# Altium PCB Hardware_Tutorial.PcbDoc
Units mm, origin at the board's own origin, x right, y up, seen from the top; angles counter-clockwise.
Board outline 60 x 60 mm, 2 copper layers (Top Layer, Bottom Layer); 31 components, 41 nets, 142 pads, 42 vias.
Unrouted connection lines stored in the file: 28.
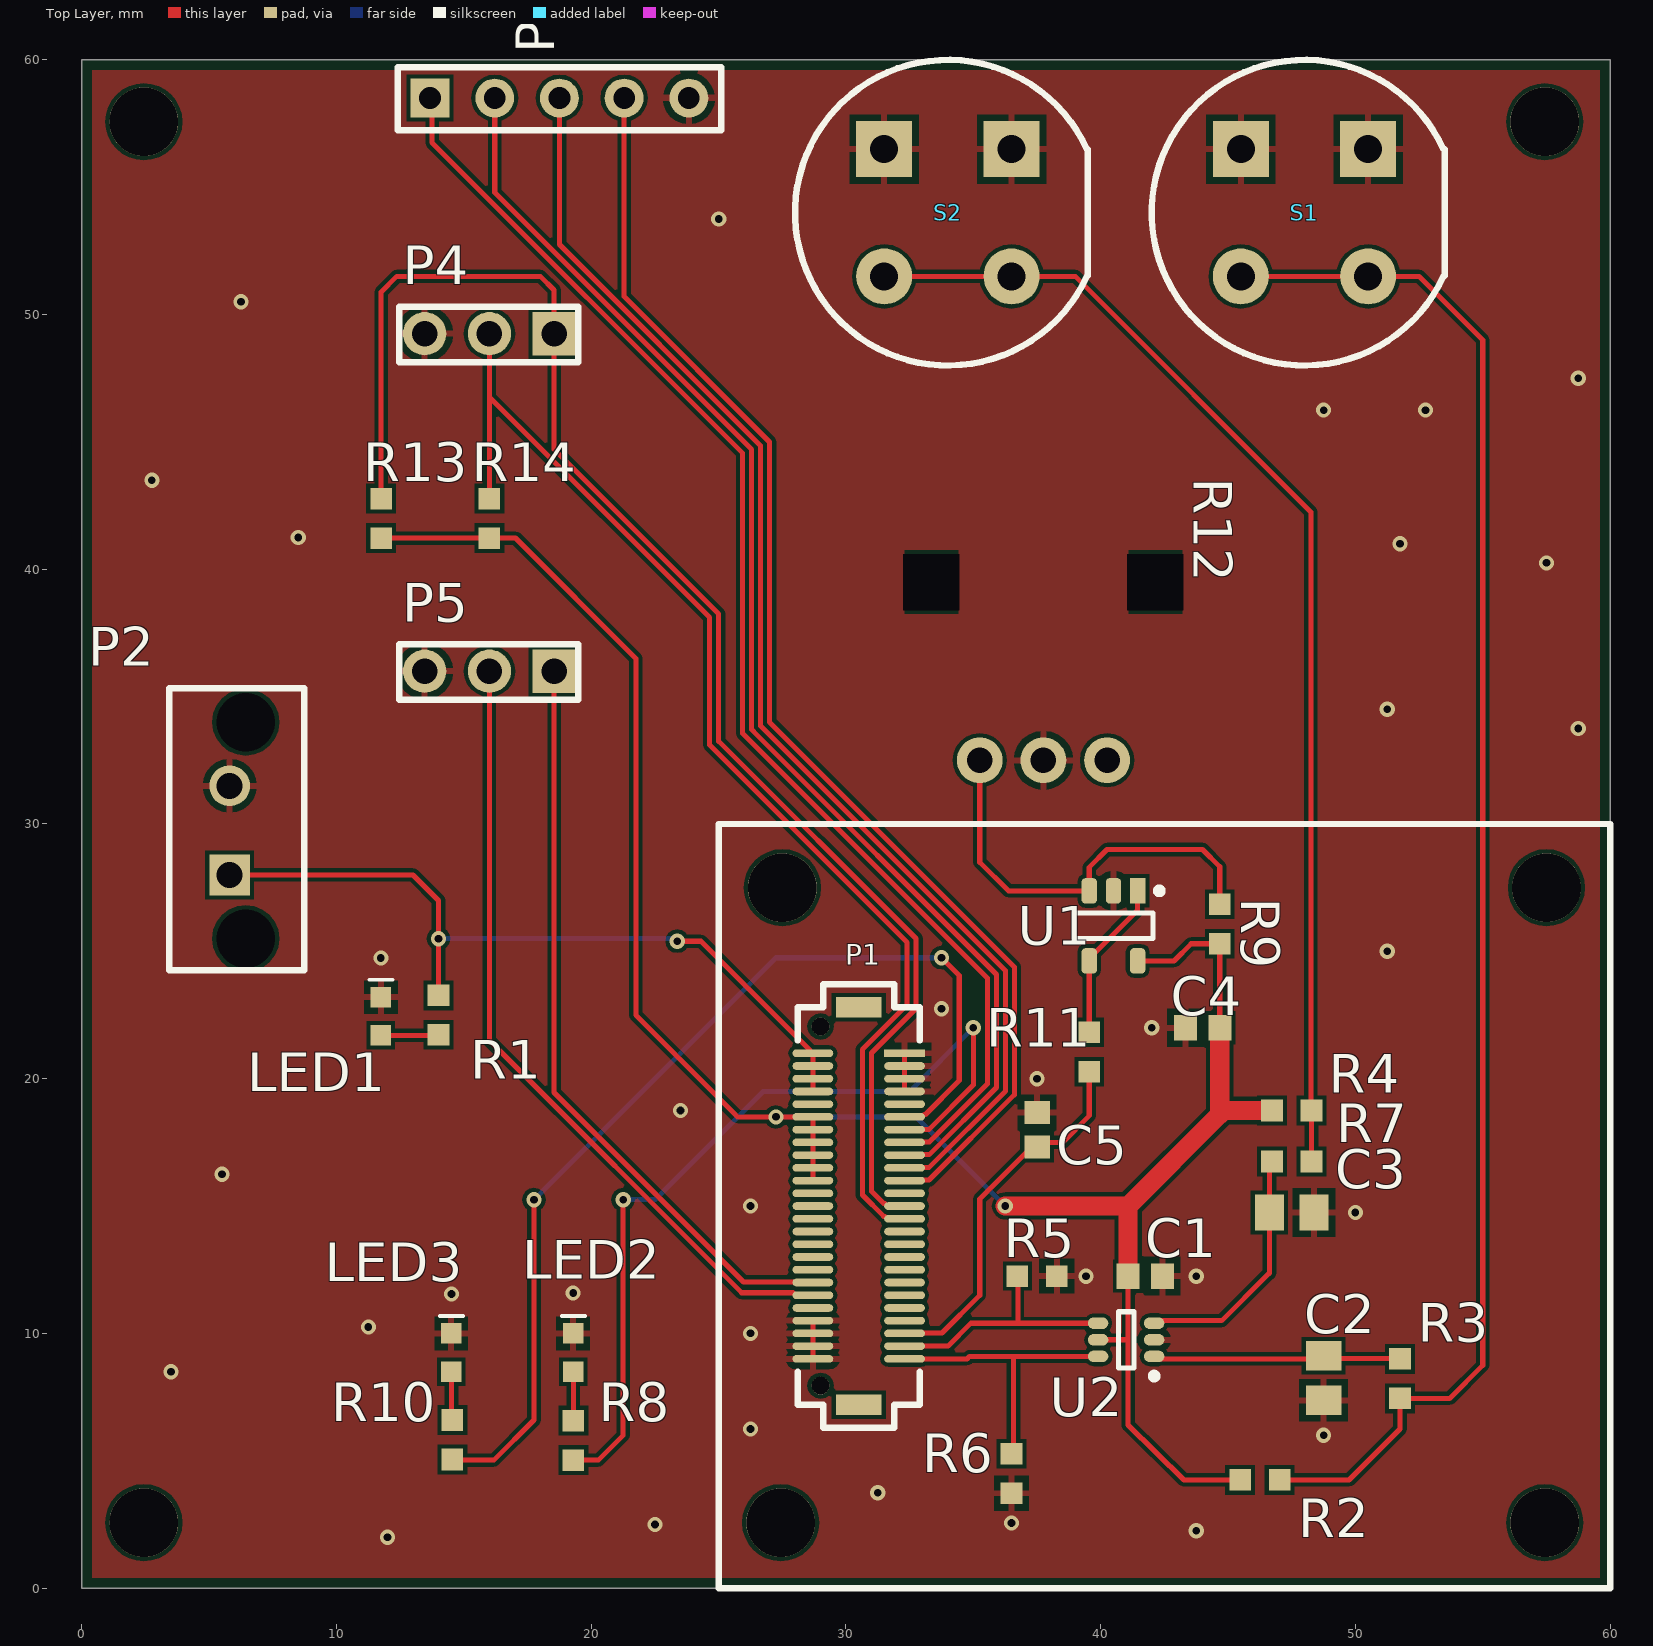
[diagram p0: Top Layer view]
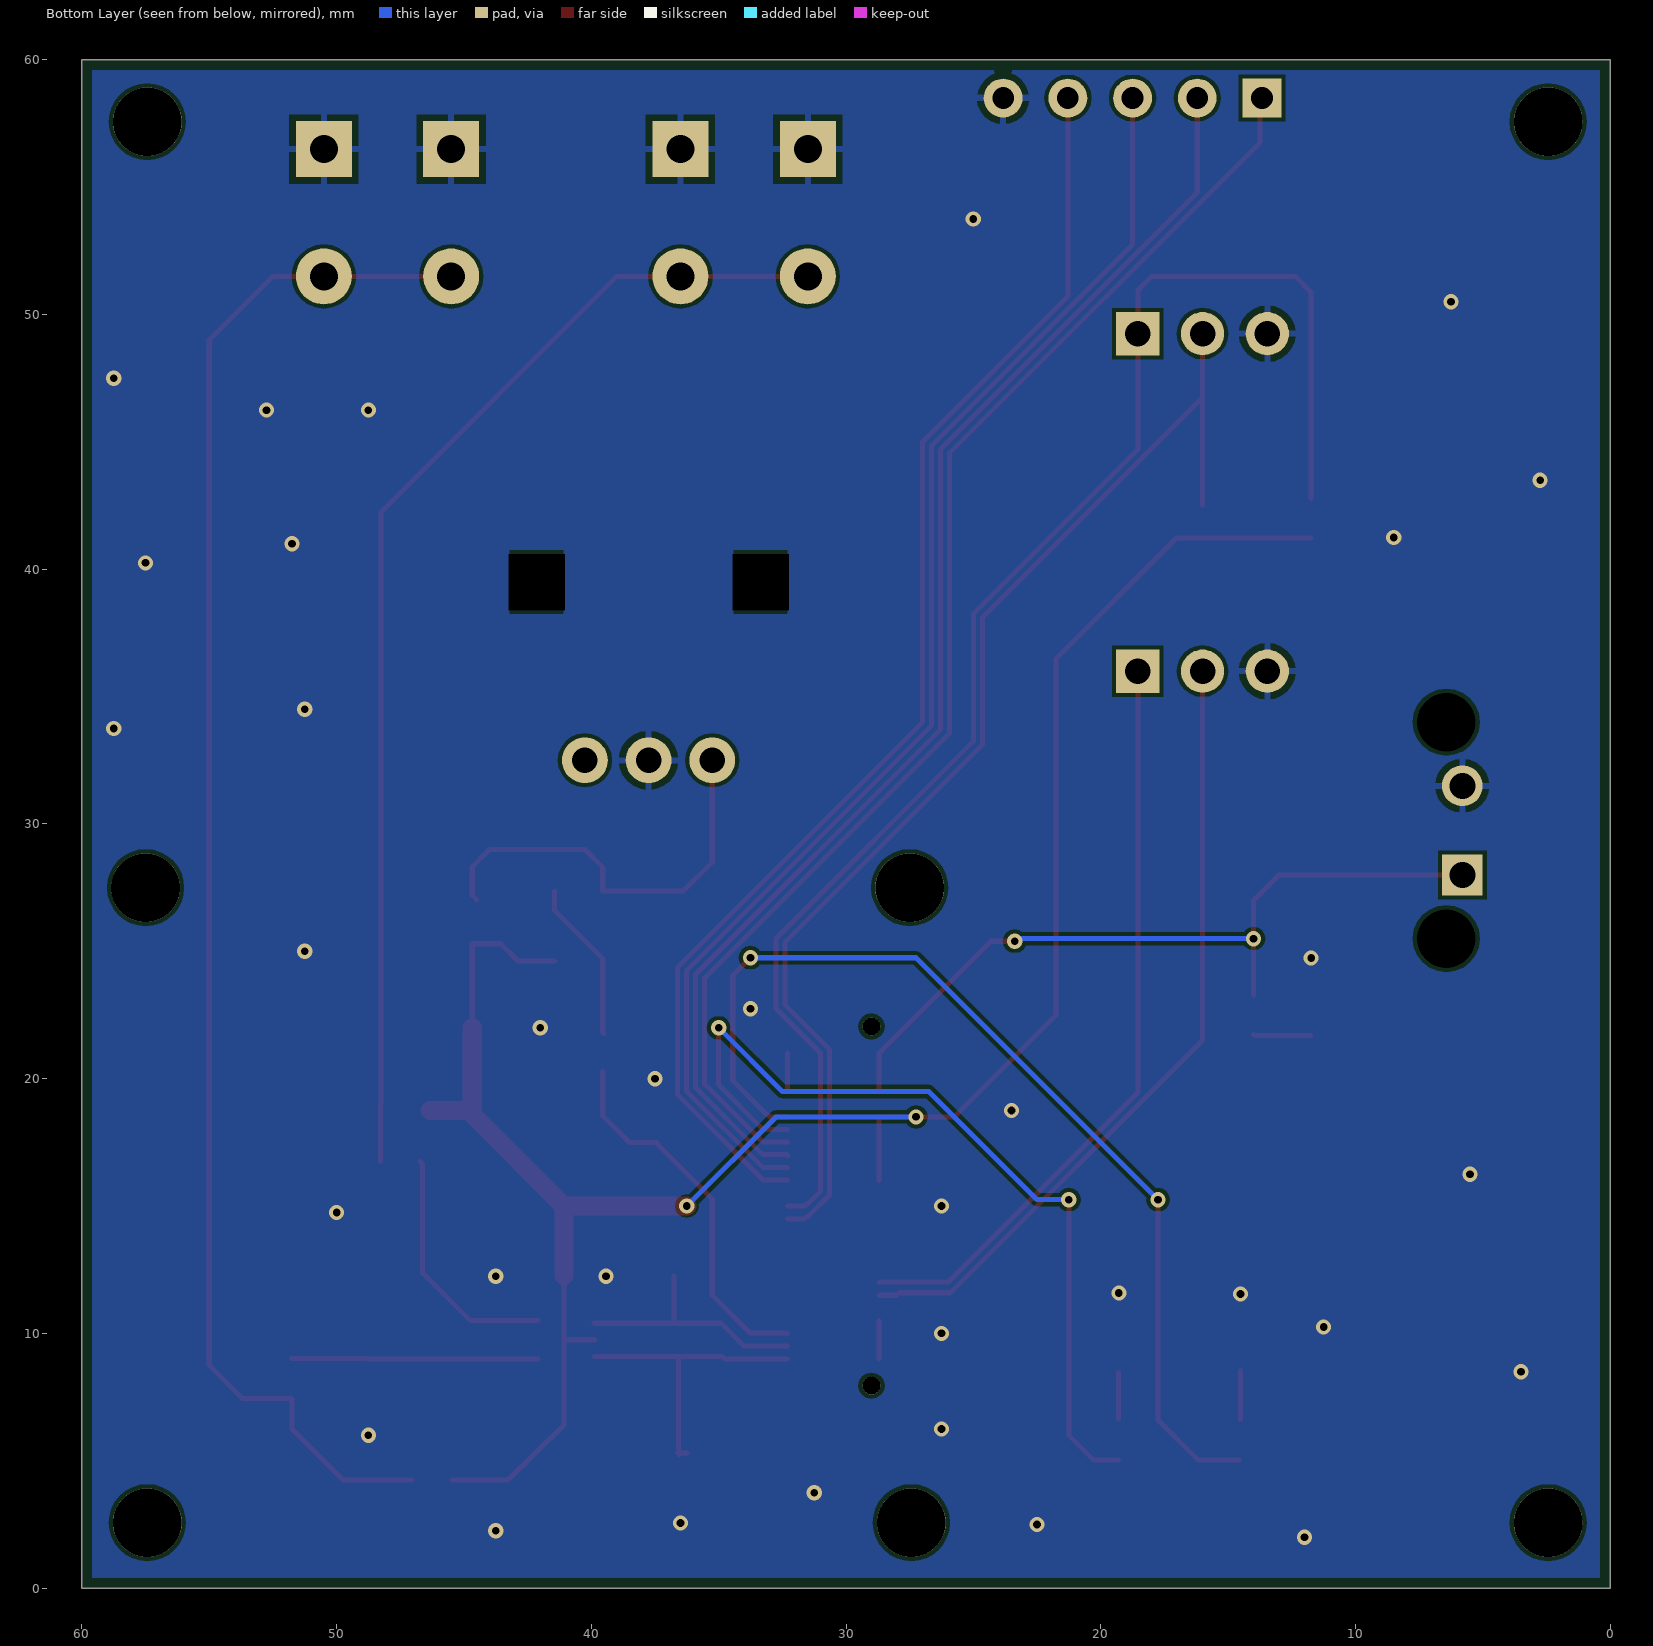
[diagram p1: Bottom Layer view, seen from below]
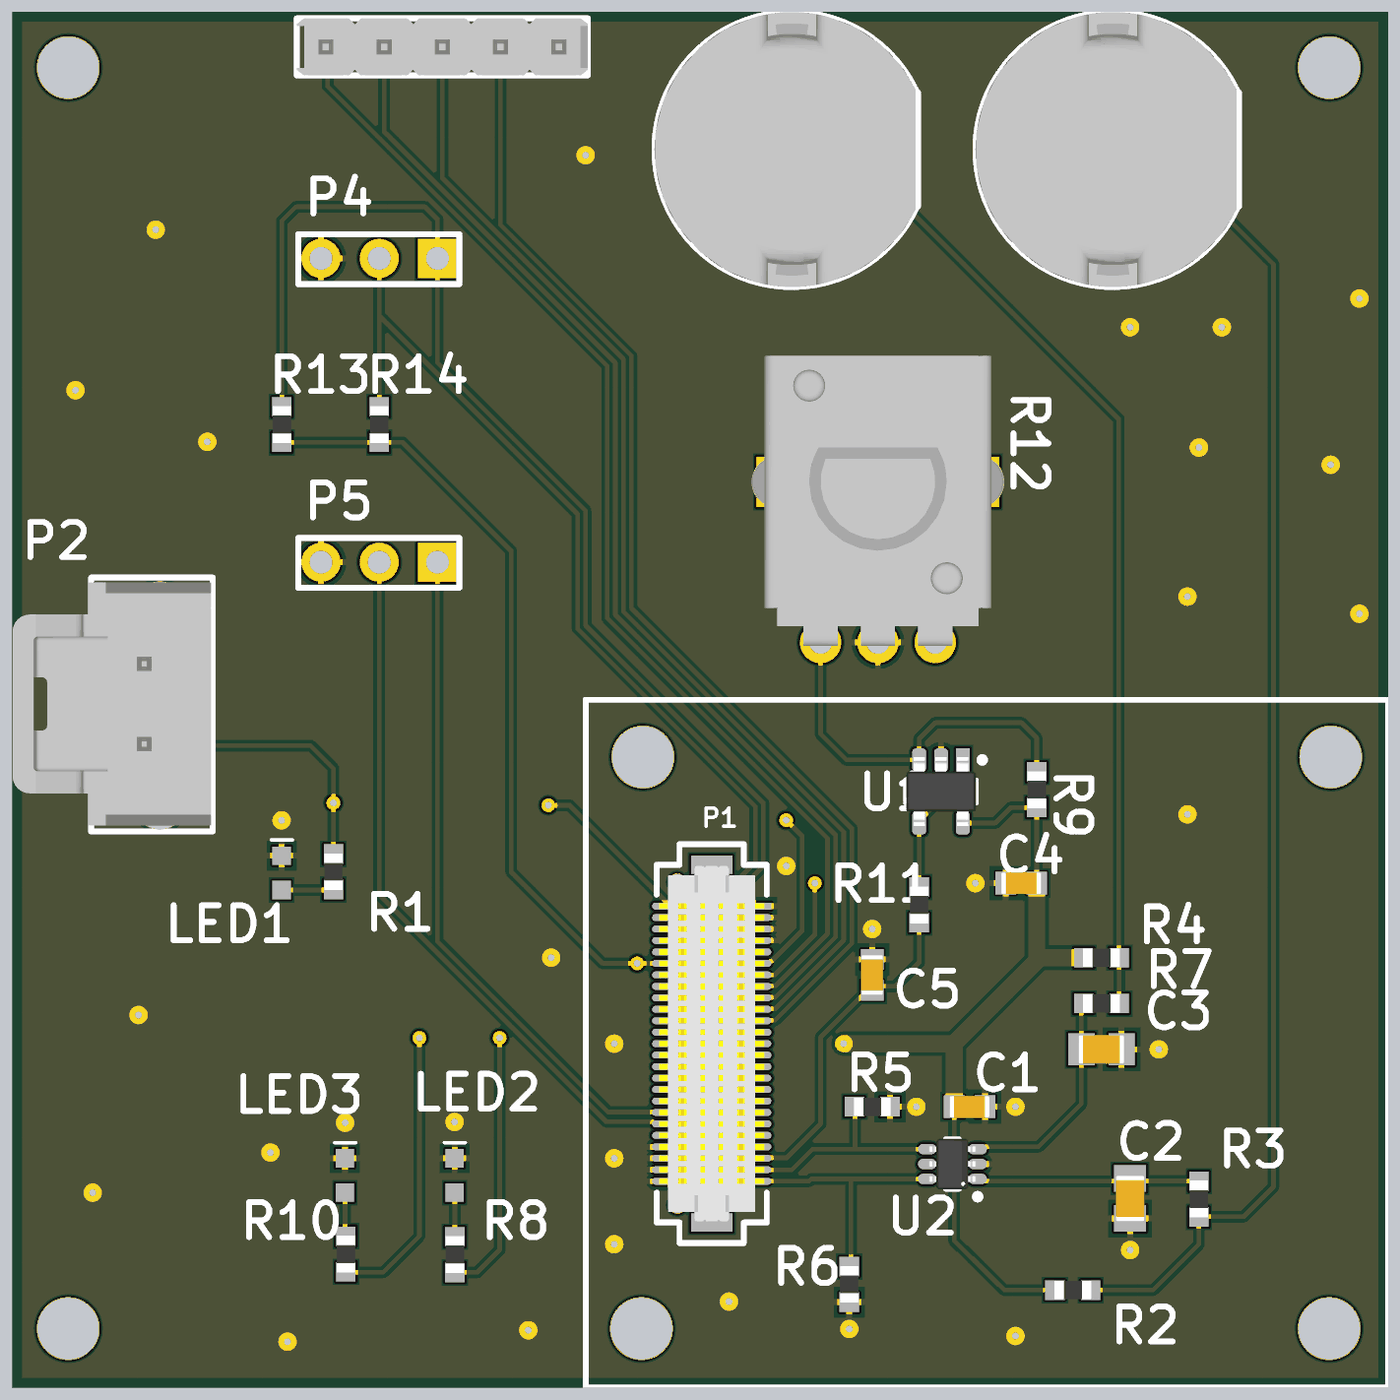
[diagram p2: 3D render of the assembled board from above, using the file's embedded part models]

## Layer stack, top to bottom
Top Solder: solder mask 0.0102, Solder Resist, Dk 3.5
Top Layer: signal copper 0.0356
Dielectric 1: dielectric 0.32, FR-4, Dk 4.8
Bottom Layer: signal copper 0.0356
Bottom Solder: solder mask 0.0102, Solder Resist, Dk 3.5

## Board outline
0,60 60,60 60,0 0,0

## Design rules (kind name [scope] priority, off if disabled: settings)
BoardOutlineClearance [All] p1: gap=0.406 ignorepadtopadclearanceinfootprint=FALSE
Clearance [All] p1: gap=0.152 ignorepadtopadclearanceinfootprint=FALSE except(0: Arc-Hole Track-Hole SMDPad-Hole THPad-Hole Via-Hole Fill-Hole Poly-Hole Region-Hole Text-Hole)
ComponentClearance ComponentClearance_ControllerBoard [InComponent('P1') vs Identifier = 'Controller_Board'] p1: gap=0 collisioncheckmode=3 verticalgap=0 showdistances=FALSE
ComponentClearance ComponentClearance_Standoffs [Identifier = 'Standoff' vs Identifier = 'Controller_Board'] p2: gap=0 collisioncheckmode=3 verticalgap=0 showdistances=FALSE
ComponentClearance [All] p3: gap=0.254 collisioncheckmode=3 verticalgap=0.254 showdistances=FALSE
HoleSize [All] p1: absolutevalues=TRUE maxlimit=6.3 minlimit=0.3 maxpercent=80.000 minpercent=20.000
MinimumAnnularRing [All] p1: minimumring=0.152
MinimumSolderMaskSliver [All] p1: minsoldermaskwidth=0.3
PolygonConnect [IsPad] p1: connectstyle=Relief reliefconductorwidth=0.254 reliefentries=4 polygonreliefangle="90 Angle" airgapwidth=0.254
PolygonConnect PolygonConnect_NoThermal [Not(IsPad)] p2: connectstyle=Direct reliefconductorwidth=0.254 reliefentries=4 polygonreliefangle="90 Angle" airgapwidth=0.254
RoutingVias [All] p1: holewidth=0.3 width=0.6 viastyle="Through Hole" minholewidth=0.3 minwidth=0.6 maxholewidth=0.711 maxwidth=1.27
SilkToSolderMaskClearance [IsPad] p1: minsilkscreentomaskgap=0.178 clearancetoexposedcopper=TRUE
SolderMaskExpansion [All] p1: expansion=0.102
Width [All] p1: maxlimit=2.54 minlimit=0.154 preferedwidth=0.2
26 further rules are at their usual default settings.

## Classes and differential pairs
component class button: * C1 C2 C3 C4 C5 LED2 LED3 R2 R3 R4 R5 R6 R7 R8 R9 R10 R11 R12 S1 S2 U1 U2
component class "Hardware Tutorial - Controller Board Interface": LED1 P1 P2 P3 P4 R1 R14

## Components (designator, comment, footprint, x,y, rotation, side; value= is the part's Value field where it differs from the comment)
C1 "CAP CER 0.1UF 50V 10% X7R 0603" "CAP, 0603" 41.75,12.25 r0 top
C2 "CAP CER 10uF 25V 10% X5R 0805" "CAP, 0805" 48.75,8.25 r270 top
C3 "CAP CER 10uF 25V 10% X5R 0805" "CAP, 0805" 47.5,14.75 r0 top
C4 "CAP CER 0.1UF 50V 10% X7R 0603" "CAP, 0603" 44,22 r180 top
C5 "CAP CER 0.1UF 50V 10% X7R 0603" "CAP, 0603" 37.5,18 r90 top
LED1 "LED GREEN CLEAR 2V 0603" LED_0603 11.75,21.75 r90 top
LED2 "LED BLUE CLEAR 2.8V 0603" LED_0603 19.295,8.55 r90 top
LED3 "LED BLUE CLEAR 2.8V 0603" LED_0603 14.51,8.55 r90 top
P1 "CONN 50POS Bergstak Plug 0.02\"" "CONN, BERGSTAK 50 POS PLUG" 30.5,15 r0 top locked
P2 "CONN 2POS ULTRA-FIT 0.138\"" "CONN, 2POS ULTRA-FIT" 5.803,28 r90 top
P3 "5POS 0.1" "CONN, 5POS HEADR 0.1\"" 13.67,58.5 r0 top
P4 "CONN 3POS HEADR MALE 0.1\"" "CONN, 3POS 0.100\" Header, 1 ROW" 18.54,49.25 r180 top
P5 "CONN 3POS HEADR MALE 0.1\"" "CONN, 3POS 0.100\" Header, 1 ROW" 18.54,36 r180 top
R1 "RES 4.7K OHM 1% 1/10W 0603" "RES, 0603" 14,22.5 r270 top
R2 "RES 10K OHM 1% 1/10W 0603" "RES, 0603" 46.25,4.25 r0 top
R3 "RES 1.6K OHM 1% 1/10W 0603" "RES, 0603" 51.75,8.225 r90 top
R4 "RES 10K OHM 1% 1/10W 0603" "RES, 0603" 47.5,18.75 r0 top
R5 "RES 10K OHM 1% 1/10W 0603" "RES, 0603" 37.5,12.25 r0 top
R6 "RES 10K OHM 1% 1/10W 0603" "RES, 0603" 36.5,4.5 r270 top
R7 "RES 1.6K OHM 1% 1/10W 0603" "RES, 0603" 47.5,16.75 r180 top
R8 "RES 510 OHM 5% 1/10W 0603" "RES, 0603" 19.295,5.8 r90 top
R9 "RES 10K OHM 1% 1/10W 0603" "RES, 0603" 44.675,26.075 r90 top
R10 "RES 510 OHM 5% 1/10W 0603" "RES, 0603" 14.545,5.825 r90 top
R11 "RES 100 OHM 1% 1/10W 0603" "RES, 0603" 39.55,21.05 r270 top
R12 "POT 10K OHM LINEAR THROUGH HOLE" "POT 10K OHM LINEAR THROUGH HOLE" 37.75,32.5 r0 top
R13 "RES 4.7K OHM 1% 1/10W 0603" "RES, 0603" 11.75,42 r90 top
R14 "RES 4.7K OHM 1% 1/10W 0603" "RES, 0603" 16,42 r90 top
S1 "SPST" "SW SPST D6 SERIES BLUE" 50.5,56.5 r180 top
S2 "SPST" "SW SPST D6 SERIES BLUE" 36.5,56.5 r180 top
U1 "IC OP AMP GEN PURPOSE RR 10MHZ SOT-23-5" "IC OP AMP GP RR 10MHZ SOT-23-5" 40.5,26 r270 top
U2 "IC INVERTER SCHMITT 2CH 6-TSSOP" SOT363 41,9.75 r180 top

## Footprints (in the part's own frame and the unit in brackets; to place one, negate y for a bottom-side part, rotate by r counter-clockwise, add the part's x,y. Pads: shape width x height; smd on the part's side, far side on the other; paste and mask are expansions set on the pad)
"CAP, 0603" [mm] "Chip Capacitor, 2-Leads, Body 1.60x0.81mm, IPC Medium Density"
  rect 0.9x1 smd mask+0.076: 1(-0.675,0) 2(0.675,0)
  body extent -0.87,-0.48 0.87,0.48, height 0.9
"CAP, 0805" [mm] "Chip Capacitor, 2-Leads, Body 2.00x1.25mm, IPC Medium Density"
  rect 1.15x1.4 smd: 1(-0.875,0) 2(0.875,0)
  body extent -1,-0.63 1,0.63, height 1.25
"CONN, 2POS ULTRA-FIT" [mm] "2 Positions Header, Shrouded Connector 0.138\" (3.50mm) Through Hole Gold"
  rect 1.6x1.6 hole 1.02: 1(0,0)
  round 1.6 hole 1.02: 2(3.5,0)
  round 1.6 hole 2.3: ""(-2.5,-0.63) ""(6,-0.63)
  silkscreen extent -3.74,-2.93 7.33,2.37, body extent -3.48,-2.87 7.12,5.79, height 13.85
"CONN, 3POS 0.100\" Header, 1 ROW" [mm] "Connector, 3 position 0.1\" (2.54mm) Through Hole Generic Header"
  rect 1.7x1.7 hole 1: 1(0,0)
  round 1.7 hole 1: 2(2.54,0) 3(5.08,0)
  silkscreen extent -0.95,-1.06 6.08,1.12
"CONN, 5POS HEADR 0.1\"" [mil]
  rect 60x60 hole 33.46: 1(0,0)
  round 60 hole 33.46: 2(100,0) 3(200,0) 4(300,0) 5(400,0)
  silkscreen extent -50,-50 450,48, body extent -50,-50 450,48, height 335
"CONN, BERGSTAK 50 POS PLUG" [mm] "Bergstak 50 Position Plug"
  rect 1.6x0.3 smd: 1(1.8,6)
  oval 1.6x0.3 smd: 2(1.8,5.5) 3(1.8,5) 4(1.8,4.5) 5(1.8,4) 6(1.8,3.5) 7(1.8,3) 8(1.8,2.5) 9(1.8,2) 10(1.8,1.5) 11(1.8,1) 12(1.8,0.5) 13(1.8,0) 14(1.8,-0.5) 15(1.8,-1) 16(1.8,-1.5) 17(1.8,-2) 18(1.8,-2.5) 19(1.8,-3) 20(1.8,-3.5) 21(1.8,-4) 22(1.8,-4.5) 23(1.8,-5) 24(1.8,-5.5) 25(1.8,-6) 26(-1.8,-6) 27(-1.8,-5.5) 28(-1.8,-5) 29(-1.8,-4.5) 30(-1.8,-4) 31(-1.8,-3.5) 32(-1.8,-3) 33(-1.8,-2.5) 34(-1.8,-2) 35(-1.8,-1.5) 36(-1.8,-1) 37(-1.8,-0.5) 38(-1.8,0) 39(-1.8,0.5) 40(-1.8,1) 41(-1.8,1.5) 42(-1.8,2) 43(-1.8,2.5) 44(-1.8,3) 45(-1.8,3.5) 46(-1.8,4) 47(-1.8,4.5) 48(-1.8,5) 49(-1.8,5.5) 50(-1.8,6)
  round 0.7 hole 0.7: ""(-1.5,-7.05) ""(-1.5,7.05)
  rect 1.8x0.8 smd: ""(0,-7.8) ""(0,7.8)
  silkscreen extent -2.4,-8.7 2.4,8.7, body extent -2.3,-7.75 2.3,7.75, height 4.2
"IC OP AMP GP RR 10MHZ SOT-23-5" [mm] "SOT23, 5-Leads, Body 2.90x2.80mm, Pitch 0.95mm, IPC Medium Density"
  rect 1x0.6 smd: 1(-1.375,0.95)
  rrect50% 1x0.6 smd: 2(-1.375,0) 3(-1.375,-0.95) 4(1.375,-0.95) 5(1.375,0.95)
  silkscreen extent -1.5,-1.55 0.5,1.93, body extent -1.5,-1.53 1.5,1.53, height 1.45
LED_0603 [mm]
  rect 0.8x0.8 smd: 1(-0.05,0.01) 2(1.45,0.01)
  silkscreen extent 2.13,-0.46 2.13,0.45, body extent -0.09,-0.39 1.51,0.41, height 0.8
"POT 10K OHM LINEAR THROUGH HOLE" [mm]
  round 1.8 hole 1: 1(-2.5,0) 2(0,0) 3(2.5,0)
  rect 1.8x2.2 hole 2.2 square: 4(-4.4,7) 4(4.4,7)
  body extent -5.7,-0.15 5.7,12.5, height 14.5
"RES, 0603" [mm] "Chip Resistor, 2-Leads, Body 1.60x0.80mm, IPC Medium Density"
  rect 0.85x0.85 smd: 1(-0.775,0) 2(0.775,0)
  body extent -0.8,-0.4 0.8,0.4, height 0.55
SOT363 [mm] "TSOP, 6-Leads, Body 2.00x1.25mm, Pitch 0.65mm, IPC Medium Density"
  oval 0.8x0.45 smd: 1(-1.1,0.65) 2(-1.1,0) 3(-1.1,-0.65) 4(1.1,-0.65) 5(1.1,0) 6(1.1,0.65)
  silkscreen extent -1.23,-1.1 0.3,1.55, body extent -1.04,-1.1 1.04,1.1, height 1.1
"SW SPST D6 SERIES BLUE" [mm]
  rect 2.2x2.2 hole 1.1: 1(0,0) 1(5,0)
  round 2.2 hole 1.1: 2(0,5) 2(5,5)
  silkscreen extent -3,-3.5 8.5,8.5, body extent -2.9,-3.5 8.5,8.5, height 6.17

## Part data
C1 C4 C5: "0.10μF ±10% 50V Ceramic Capacitor X7R 0603 (1608 Metric)", Capacitance=0.1μF, Manufacturer 1="AVX Corporation", Manufacturer Part Number 1=06035C104KAT2A, Operating Temperature="-55°C ~ 125°C", Package / Case="0603 (1608 Metric)", Ratings=-, Supplier Part Number 1=478-5052-1-ND, Temperature Coefficient=X7R, Tolerance=±10%, Voltage=50V, ComponentLink1Description=http://datasheets.avx.com/X7RDielectric.pdf, ComponentLink1URL=http://datasheets.avx.com/X7RDielectric.pdf, Height - Seated (Max)=-, Lead Spacing=-, Lead Style=-, Mounting Type="Surface Mount, MLCC", Packaging="Cut Tape (CT)", Part Status=Active, Size / Dimension="0.063\" L x 0.032\" W (1.60mm x 0.81mm)", Supplier 1=Digi-Key, Thickness (Max)="0.035\" (0.90mm)"
C2 C3: "10μF ±10% 25V Ceramic Capacitor X5R 0805 (2012 Metric)", Capacitance=10μF, Manufacturer="Murata Electronics North America", Manufacturer Part Number=GRM21BR61E106KA73L, Operating Temperature="-55°C ~ 85°C", Package / Case="0805 (2012 Metric)", Ratings=-, Supplier Part Number 1=490-5523-1-ND, Temperature Coefficient=X5R, Tolerance=±10%, Voltage - Rated=25V, Applications="General Purpose", Category=Capacitors, ComponentLink1Description=http://search.murata.co.jp/Ceramy/image/img/A01X/G101/ENG/GRM21BR61E106KA73-01.pdf, ComponentLink1URL=http://search.murata.co.jp/Ceramy/image/img/A01X/G101/ENG/GRM21BR61E106KA73-01.pdf, Features=-, Height - Seated (Max)=-, Lead Spacing=-, Lead Style=-, Mounting Type="Surface Mount, MLCC", Packaging="Cut Tape (CT)", Part Status=Active, Pricing 1="1=0.3, 10=0.214, 100=0.1008, 500=0.07068, 1000=0.05851 (CAD)", RoHS="RoHS Compliant", Size / Dimension="0.079\" L x 0.049\" W (2.00mm x 1.25mm)", Stock 1=1695157, Supplier 1=Digi-Key, Thickness (Max)="0.053\" (1.35mm)"
LED1: "Green 572nm LED Indication - Discrete 2V 0603 (1608 Metric)", Color=Green, Current - Test=20mA, Lens Color=Colorless, Manufacturer="Wurth Electronics Inc.", Manufacturer Part Number=150060VS75000, Millicandela Rating=40mcd, Package / Case="0603 (1608 Metric)", Supplier Device Package=0603, Supplier Part Number 1=732-4980-1-ND, Voltage - Forward (Vf) (Typ)=2V, Category=Optoelectronics, ComponentLink1Description=http://katalog.we-online.de/led/datasheet/150060VS75000.pdf, ComponentLink1URL=http://katalog.we-online.de/led/datasheet/150060VS75000.pdf, Features=-, Height (Max)=0.80mm, Lens Style/Size="Rectangle with Flat Top, 1.10mm x 0.70mm", Lens Transparency=Clear, Mounting Type="Surface Mount", Packaging="Cut Tape (CT)", Part Status=Active, Pricing 1="1=0.21, 100=0.1617, 500=0.13964 (CAD)", RoHS="RoHS Compliant", Size / Dimension="1.60mm L x 0.80mm W", Stock 1=9408, Supplier 1=Digi-Key, Viewing Angle=140°, Wavelength - Dominant=570nm, Wavelength - Peak=572nm
LED2 LED3: "Blue 470nm LED Indication - Discrete 2.8V 0603 (1608 Metric)", Color=Blue, Current - Test=5mA, Lens Color=Colorless, Manufacturer 1="Lite-On Inc.", Manufacturer Part Number 1=LTST-C193TBKT-5A, Millicandela Rating=15mcd, Package / Case="0603 (1608 Metric)", Supplier Device Package="Chip LED", Supplier Part Number 1=160-1827-1-ND, Voltage - Forward (Vf) (Typ)=2.8V, ComponentLink1Description=http://optoelectronics.liteon.com/upload/download/DS22-2004-060/P_100_LTST-C193TBKT-5A.pdf, ComponentLink1URL=http://optoelectronics.liteon.com/upload/download/DS22-2004-060/P_100_LTST-C193TBKT-5A.pdf, Height (Max)=0.45mm, Lens Style/Size="Rectangle with Flat Top, 1.15mm x 0.80mm", Lens Transparency=Clear, Mounting Type="Surface Mount", Packaging="Cut Tape (CT)", Part Status=Active, Size / Dimension="1.60mm L x 0.80mm W", Supplier 1=Digi-Key, Viewing Angle=130°, Wavelength - Dominant=470nm, Wavelength - Peak=468nm
P1: "50 Position Connector Plug, Outer Shroud Contacts Surface Mount Gold", Manufacturer 1="Amphenol FCI", Manufacturer Part Number 1=10132797-055100LF, Supplier Part Number 1=609-5226-1-ND, ComponentLink1Description=http://portal.fciconnect.com/Comergent//fci/drawing/10132797.pdf, ComponentLink1URL=http://portal.fciconnect.com/Comergent//fci/drawing/10132797.pdf, Connector Type="Plug, Outer Shroud Contacts", Contact Finish=Gold, Contact Finish Thickness="1μin (0.025μm)", Height Above Board="0.169\" (4.30mm)", Mated Stacking Heights=5mm, Mounting Type="Surface Mount", Number of Positions=50, Number of Rows=2, Packaging="Cut Tape (CT)", Part Status=Active, Pitch="0.020\" (0.50mm)", Series="BergStak Plug", Supplier 1=Digi-Key
P2: "Connector Header Through Hole 2 position 0.138\" (3.50mm)", Color=Black, Manufacturer=Molex, Manufacturer Part Number=1722871102, Supplier Part Number 1=WM11701-ND, ComponentLink1Description=http://www.molex.com/pdm_docs/sd/1722861302_sd.pdf, ComponentLink1URL=http://www.molex.com/pdm_docs/sd/1722861302_sd.pdf, Connector Type="Male Pin", Contact Plating=Tin, Fastening Type=Latch, Mount="Through Hole", Number of Positions=2, Number of Rows=1, Packaging=Tray, Pitch=0.138inch, Pricing 1="1 = 0.78000, 10 = 0.68800, 100 = 0.59380, 500 = 0.48582, 1000 = 0.43184, 5000 = 0.37786, 10000 = 0.35897 (USD)", RoHS=Yes, Series=UltraFit, Stock 1=2743, Supplier 1=Digi-Key, Termination=Solder
P3: library part "CONN 5POS HEADR MALE 0.1in", "5 Positions Header, Breakaway Connector 0.100\" (2.54mm) Through Hole Tin", Colour=Black, Contact Resistance=20mR, Manufacturer 1=Molex, Manufacturer Part Number 1=0022284050, Max Operating Temperature=75°C, Max Voltage Rating (AC)=250V, Min Operating Temperature=0°C, Supplier Part Number 1=WM50014-05-ND, ComponentLink1Description=https://datasheet.ciiva.com/6814/022284363-sd-6814049.pdf, ComponentLink1URL=https://datasheet.ciiva.com/6814/022284363-sd-6814049.pdf, ComponentLink2Description=https://datasheet.ciiva.com/14804/179390022284050-pcb-headers-14804361.pdf, ComponentLink2URL=https://datasheet.ciiva.com/14804/179390022284050-pcb-headers-14804361.pdf, ComponentLink3Description=https://datasheet.ciiva.com/15217/getdatasheetpartid-256138-15217709.pdf, ComponentLink3URL=https://datasheet.ciiva.com/15217/getdatasheetpartid-256138-15217709.pdf, Connector Type="Male Pin", Contact Material=Bronze,Brass, Contact Mating Length=0.24inch, Contact Plating=Nickel,Tin, Depth=2.49mm, Description 1="Conn Unshrouded Header HDR 5 POS 2.54mm Solder ST Thru-Hole KK? Bag", Gender=Male, Housing Colour=Black, Housing Material=Nylon, Length=12.7mm, Max Voltage Rating (DC)=250V, Mount="Through Hole", Number of Contacts=5, Number of Positions=5, Number of Rows=1, Orientation=Straight, Packaging=Bulk, Pitch=2.54mm, Pricing 1="1=0.22, 10=0.21, 25=0.1796, 50=0.157, 100=0.1459, 250=0.129, 500=0.1234 (USD)", Stock 1=3161, Supplier 1=Digi-Key, Termination=Solder
P4 P5: "3 Positions Header Connector 0.100\" (2.54mm) Through Hole Gold", Current Rating=3A, Insulation Color=Black, Manufacturer 1="Wurth Electronics Inc.", Manufacturer Part Number 1=61300311121, Material Flammability Rating="UL94 V-0", Operating Temperature="-40°C ~ 125°", Supplier Part Number 1=732-5316-ND, Voltage=250V, ComponentLink1Description=http://katalog.we-online.de/em/datasheet/6130xx11121.pdf, ComponentLink1URL=http://katalog.we-online.de/em/datasheet/6130xx11121.pdf, Connector Type=Header, Contact Finish - Mating=Gold, Contact Finish - Post=-, Contact Finish Thickness - Mating=-, Contact Finish Thickness - Post=-, Contact Length - Mating="0.236\" (6.00mm)", Contact Length - Post="0.118\" (3.00mm)", Contact Material="Copper Alloy", Contact Shape=Square, Contact Type="Male Pin", Fastening Type=-, Ingress Protection=-, Insulation Height="0.100\" (2.54mm)", Insulation Material="Polybutylene Terephthalate (PBT)", Mated Stacking Heights=-, Mounting Type="Through Hole", Number of Positions=3, Number of Positions Loaded=All, Number of Rows=1, Overall Contact Length="0.454\" (11.54mm)", Packaging=Bulk, Part Status=Active, Pitch - Mating="0.100\" (2.54mm)", Row Spacing - Mating=-, Shrouding=Unshrouded, Style="Board to Board or Cable", Supplier 1=Digi-Key, Termination=Solder
R1 R13 R14: "4.7k Ohm ±1% 0.1W, 1/10W Chip Resistor 0603 (1608 Metric) Moisture Resistant Thick Film", Manufacturer 1=Yageo, Manufacturer Part Number 1=RC0603FR-074K7L, Operating Temperature="-55°C ~ 155°", Package / Case="0603 (1608 Metric)", Power (Watts)=1/10W, Resistance (Ohms)=4.7k, Supplier Device Package=0603, Supplier Part Number 1=311-4.70KHRCT-ND, Temperature Coefficient=±100ppm/°, Tolerance=±1%, Category=Resistors, ComponentLink1Description=http://www.yageo.com/documents/recent/PYu-RC_Group_51_RoHS_L_7.pdf, ComponentLink1URL=http://www.yageo.com/documents/recent/PYu-RC_Group_51_RoHS_L_7.pdf, Composition="Thick Film", Description 1="RES SMD 4.7K OHM 1% 1/10W 0603", Failure Rate=-, Features="Moisture Resistant", Height - Seated (Max)="0.022\" (0.55mm)", Packaging="Cut Tape (CT)", Part Status=Active, Pricing 1="1=0.16, 10=0.022, 100=0.0089, 1000=0.00402, 2500=0.00349 (CAD)", RoHS="RoHS Compliant", Size / Dimension="0.063\" L x 0.031\" W (1.60mm x 0.80mm)", Stock 1=3487566, Supplier 1=Digi-Key
R2 R4 R5 R6 R9: "RES SMD 10K OHM 1% 1/10W 0603", Manufacturer 1=Yageo, Manufacturer Part Number 1=RC0603FR-0710KL, Operating Temperature="-55°C ~ 155°", Package / Case="0603 (1608 Metric)", Power=1/10W, Resistance=10k, Supplier Device Package=0603, Supplier Part Number 1=311-10.0KHRCT-ND, Temperature Coefficient=±100ppm/°, Tolerance=±1%, ComponentLink1Description=http://www.yageo.com/documents/recent/PYu-RC_Group_51_RoHS_L_7.pdf, ComponentLink1URL=http://www.yageo.com/documents/recent/PYu-RC_Group_51_RoHS_L_7.pdf, Composition="Thick Film", Failure Rate=-, Height - Seated (Max)="0.022\" (0.55mm)", Packaging="Cut Tape (CT)", Part Status=Active, Size / Dimension="0.063\" L x 0.031\" W (1.60mm x 0.80mm)", Supplier 1=Digi-Key
R3 R7: "1.6 kOhms ±1% 0.1W, 1/10W Chip Resistor 0603 (1608 Metric) Moisture Resistant Thick Film", Case/Package=0603, Case Code (Metric)=1608, Manufacturer=Yageo, Manufacturer Part Number=RC0603FR-071K6L, Max Operating Temperature=155°C, Min Operating Temperature=-55°C, Power Rating=1/10W, Resistance=1.6k, Supplier Part Number 1=311-1.60KHRCT-ND, Temperature Coefficient=100ppm/°C, Tolerance=1%, Voltage Rating=50V, Working Voltage=75V, Case Code (Imperial)=0603, ComponentLink1Description=http://components.arrow.com/part/dataview/0323_00200779, ComponentLink1URL=http://components.arrow.com/part/dataview/0323_00200779, ComponentLink2Description=http://www.yageo.com.tw/exep/pages/download/literatures/PYu-R_INT-thick_7.pdf, ComponentLink2URL=http://www.yageo.com.tw/exep/pages/download/literatures/PYu-R_INT-thick_7.pdf, ComponentLink3Description=http://www.mouser.com/ds/2/447/RC0603-272842.pdf, ComponentLink3URL=http://www.mouser.com/ds/2/447/RC0603-272842.pdf, ComponentLink4Description=http://www.yageo.com/documents/recent/PYu-RC0603_51_RoHS_L_v5.pdf, ComponentLink4URL=http://www.yageo.com/documents/recent/PYu-RC0603_51_RoHS_L_v5.pdf, Composition="Thick Film", Depth=0.8mm, Lead Free="Lead Free", Length=1.6mm, Military Standard=Not, Number of Terminations=2, Packaging="Tape and Reel", Pricing 1="1=0.1, 10=0.015, 100=0.006, 1000=0.0027, 2500=0.0023 (USD)", Stock 1=189550, Supplier 1=Digi-Key, Termination=SMD/SMT, Voltage Rating (DC)=50V
R8 R10: "RES SMD 510 OHM 5% 1/10W 0603", Manufacturer 1=Yageo, Manufacturer Part Number 1=RC0603JR-07510RL, Operating Temperature="-55°C ~ 155°", Package / Case="0603 (1608 Metric)", Power=1/10W, Resistance=510, Supplier Device Package=0603, Supplier Part Number 1=311-510GRCT-ND, Temperature Coefficient=±100ppm/°, Tolerance=±5%, ComponentLink1Description=http://www.yageo.com/documents/recent/PYu-RC_Group_51_RoHS_L_7.pdf, ComponentLink1URL=http://www.yageo.com/documents/recent/PYu-RC_Group_51_RoHS_L_7.pdf, Composition="Thick Film", Failure Rate=-, Height - Seated (Max)="0.022\" (0.55mm)", Packaging="Cut Tape (CT)", Part Status=Active, Size / Dimension="0.063\" L x 0.031\" W (1.60mm x 0.80mm)", Supplier 1=Digi-Key
R11: "100 Ohm ±1% 0.1W, 1/10W Chip Resistor 0603 (1608 Metric) Moisture Resistant Thick Film", Manufacturer 1=Yageo, Manufacturer Part Number 1=RC0603FR-07100RL, Operating Temperature="-55°C ~ 155°", Package / Case="0603 (1608 Metric)", Power=1/10W, Resistance=100, Supplier Device Package=0603, Supplier Part Number 1=311-100HRCT-ND, Temperature Coefficient=±100ppm/°, Tolerance=±1%, ComponentLink1Description=http://www.yageo.com/documents/recent/PYu-RC_Group_51_RoHS_L_7.pdf, ComponentLink1URL=http://www.yageo.com/documents/recent/PYu-RC_Group_51_RoHS_L_7.pdf, Composition="Thick Film", Failure Rate=-, Height - Seated (Max)="0.022\" (0.55mm)", Packaging="Cut Tape (CT)", Part Status=Active, Size / Dimension="0.063\" L x 0.031\" W (1.60mm x 0.80mm)", Supplier 1=Digi-Key
R12: Manufacturer 1=Bourns, Manufacturer Part Number 1=PTV09A-4015F-B103, Max Operating Temperature=50°C, Max Power Dissipation=50mW, Min Operating Temperature=-10°C, Package Quantity=100, Resistance=10kR, Supplier Part Number 1=PTV09A-4015F-B103-ND, Tolerance=20%, Actuator Diameter=0.236inch, Actuator Length=0.591inch, ComponentLink1Description=https://datasheet.ciiva.com/8701/ptv09-8701798.pdf?src-supplier=Avnet, ComponentLink1URL=https://datasheet.ciiva.com/8701/ptv09-8701798.pdf?src-supplier=Avnet, ComponentLink2Description=https://datasheet.ciiva.com/4991/ptv09-4991849.pdf?src-supplier=Mouser, ComponentLink2URL=https://datasheet.ciiva.com/4991/ptv09-4991849.pdf?src-supplier=Mouser, ComponentLink3Description=https://datasheet.ciiva.com/6249/ptv09-6249515.pdf?src-supplier=Digi-Key, ComponentLink3URL=https://datasheet.ciiva.com/6249/ptv09-6249515.pdf?src-supplier=Digi-Key, Composition=Carbon, Depth=12.5mm, Length=11.4mm, Military Standard=Not, Mount="Through Hole", Number of Gangs=1, Number of Turns=1, Packaging=Bulk, Power Rating=50mW, Pricing 1="1=0.83000, 10=0.74400, 25=0.67200, 50=0.64800, 100=0.61200, 300=0.58800, 500=0.55200, 1000=0.45600, 5000=0.37200 (USD)", Radiation Hardening=No, REACH SVHC="No SVHC", RoHS=Yes, Stock 1=744, Supplier 1=Digi-Key, Taper=Linear, Termination=PCB, Type=Potentiometer
S1 S2: library part "SW SPST-NO 0.1A 32V D6 Series Blue", "Pushbutton Switch SPST-NO Keyswitch Through Hole D6 Series Blue", Color - Actuator/Cap=Blue, Current Rating="100mA (DC)", Illumination Type, Color=-, Manufacturer=C&K, Manufacturer Part Number="D6R60 F1 LFS", Operating Temperature="-20°C ~ 85°", Supplier Part Number 1=401-1977-ND, Voltage Rating - DC=32V, Actuator Type="Round, Button", Category=Switches, Circuit=SPST-NO, ComponentLink1Description=http://www.ckswitches.com/media/1341/d6.pdf, ComponentLink1URL=http://www.ckswitches.com/media/1341/d6.pdf, Electrical Life="250,000 Cycles", Features="Tactile Feedback", Illumination Voltage (Nominal)=-, Ingress Protection=-, Mechanical Life=-, Mounting Type="Through Hole", Packaging=Bulk, Panel Cutout Dimensions=-, Part Status=Active, Pricing 1="1=1.73, 10=1.607, 25=1.5308, 50=1.454, 100=1.4158, 250=1.37756, 500=1.30102, 1000=1.22448, 5000=1.03316 (CAD)", RoHS="RoHS Compliant", Stock 1=3385, Supplier 1=Digi-Key, Switch Function=Off-Mom, Termination Style="PC Pin", Type=Keyswitch, Voltage Rating - AC=-
U1: "General Purpose Amplifier 1 Circuit Rail-to-Rail SOT-23-5", Current - Output / Channel=50mA, Current - Supply=400μA, Manufacturer 1="Texas Instruments", Manufacturer Part Number 1=TLV316QDBVRQ1, Operating Temperature="-40°C ~ 125°C", Package / Case="SC-74A, SOT-753", Supplier Device Package=SOT-23-5, Supplier Part Number 1=296-45323-1-ND, Voltage - Supply, Single/Dual (±)="1.8 V ~ 5.5 V, ±0.9 V ~ 2.75 V", -3db Bandwidth=-, Amplifier Type="General Purpose", Category="Integrated Circuits (ICs)", ComponentLink1Description=http://www.ti.com/lit/ds/symlink/tlv316-q1.pdf, ComponentLink1URL=http://www.ti.com/lit/ds/symlink/tlv316-q1.pdf, Description 1="IC OP AMP GP RR 10MHZ 5-SOT-23", Mounting Type="Surface Mount", Number of Circuits=1, Output Type=Rail-to-Rail, Packaging="Cut Tape (CT)", Part Status=Active, Pricing 1="1=1.33, 10=1.185, 100=0.9234, 500=0.76276, 1000=0.60218 (CAD)", RoHS="RoHS Compliant", Slew Rate="6 V/μs", Stock 1=1747, Supplier 1=Digi-Key
U2: "2CH 6-TSSOP", Supplier Part Number 1=1727-2072-1-ND, Supplier 1=Digi-Key

## Free pads (board coordinates)
  round 2.7 hole 2.7: ""(2.434,2.57) ""(2.434,57.57) ""(27.434,2.57) ""(27.5,27.5) ""(57.434,2.57) ""(57.434,57.57) ""(57.5,27.5)

## Via types
v1: diameter 0.6, hole 0.3, Top Layer to Bottom Layer, 42 vias

## Nets (pads, with @x,y where several pads share a name; then routed paths per layer and width w, separated by ;. In a path a pad name is that pad's centre, name@x,y a point inside that pad or via, vN(x,y) a via of type N, cw(c..) or ccw(c..) an arc to the next point about the centre after c; other vN are vias at no path point)
3V3: C1.1 C4.1 P1.40 P1.41 P1.42 P1.43 P1.44 P1.45 R2.1 R4.1 R9.1 R13.1 R14.1 U1.5 U2.5 | length 84.2
  Top Layer w0.2: R13.1 R14.1 17.025,41.225 21.749,36.501 21.749,22.501 25.75,18.5 v1(27.25,18.5) P1.45 P1.44 P1.43 P1.42 P1.41 P1.40 ; U2.5@39.85,9.75 U2.5 41.075,9.75 ; C1.1 41.075,9.75 ; U1.5 42.875,24.625 43.55,25.3 R9.1 C4.1 ; R2.1 43.271,4.25 41.075,6.4 41.075,9.75
  Top Layer w0.75: v1(36.25,15) 41.075,15 ; C1.1 41.075,15 ; 44.675,18.6 41.075,15 ; C4.1 44.675,18.75 R4.1@46.325,18.75
  Bottom Layer w0.2: v1(27.25,18.5) 32.75,18.5 v1(36.25,15)
"BUTTON 1 FILTERED": C2.1 R3.2 U2.1 | length 9.7
  Top Layer w0.2: U2.1@42.1,9 48.75,9 48.772,9.004 48.816,9.012 51.763,9.012 R3.2@51.75,9.025
"BUTTON 2 FILTERED": C3.1 R7.2 U2.3 | length 9.7
  Top Layer w0.2: U2.3@42.1,10.5 44.75,10.5 46.5,12.25 46.625,12.375 C3.1 46.625,16.65 R7.2
GND: C1.2 C2.2 C3.2 C4.2 C5.2 LED1.2 LED2.2 LED3.2 P1.1 P1.2 P1.3 P1.4 P1.26 P1.27 P1.28 P1.29 P2.2 P3.5 P4.3 P5.3 R5.2 R6.2 R12.2 S1.1 S2.1 U1.2 U2.2 | length 3
  Top Layer w0.2: P1.26 P1.27 P1.28 P1.29 ; P1.4 P1.3 P1.2 P1.1
  other v1: 12,2 43.75,2.25 22.5,2.5 36.5,2.556 31.25,3.75 48.75,6 26.25,6.25 3.5,8.5 26.25,10 11.25,10.25 14.51,11.55 19.285,11.585 39.425,12.25 43.75,12.25 50,14.75 26.25,15 5.5,16.25 23.5,18.75 37.5,20 42,22 33.75,22.75 11.74,24.74 51.25,25 58.75,33.75 51.25,34.5 57.5,40.25 51.75,41 8.5,41.25 2.75,43.5 48.75,46.25 52.75,46.25 58.75,47.5 6.25,50.5 25,53.75
NetLED1_1: LED1.1 R1.2 | length 2.3
  Top Layer w0.2: LED1.1 13.975,21.7 R1.2
NetLED2_1: LED2.1 R8.2 | length 1.8
  Top Layer w0.2: R8.2@19.295,6.65 LED2.1@19.295,8.461
NetLED3_1: LED3.1 R10.2 | length 1.9
  Top Layer w0.2: LED3.1@14.51,8.55 14.51,6.635 R10.2@14.52,6.625
NetR2_2: R2.2 R3.1 S1.2 | length 61.7
  Top Layer w0.2: S1.2@45.5,51.5 S1.2@50.25,51.5 ; R2.2 49.75,4.25 51.75,6.25 R3.1 53.7,7.45 55,8.75 55,49 52.5,51.5 50.5,51.5 S1.2@50.25,51.5 ; S1.2@50.5,51.25 S1.2@50.25,51.5
NetR4_2: R4.2 R7.1 S2.2 | length 46.1
  Top Layer w0.2: S2.2@31.5,51.5 36.5,51.5 39,51.5 48.25,42.25 48.25,19 48.275,18.975 R7.1
NetR9_2: R9.2 R12.1 U1.3 | length 16.3
  Top Layer w0.2: R12.1@35.25,32 35.25,28.5 36.375,27.375 U1.3 39.55,28.3 40.25,29 44,29 44.675,28.325 44.675,27.2 R9.2@44.5,27.025
NetR11_1: R11.1 U1.1 U1.4 | length 6.4
  Top Layer w0.2: R11.1@39.5,21.775 R11.1 U1.4 39.55,24.723 41.45,26.623 U1.1
PA0_AN0_BUTTON1: P1.25 R6.1 U2.6 | length 11.8
  Top Layer w0.2: P1.25 34.75,9 34.85,9.1 36.575,9.1 ; R6.1@36.25,5.3 36.575,5.3 36.575,9.1 ; R6.1@36.55,5.244 R6.1@36.606,5.3 ; U2.6 36.575,9.1
PA1_AN1_BUTTON2: P1.24 R5.1 U2.4 | length 9.8
  Top Layer w0.2: P1.24 34,9.5 34.9,10.4 36.75,10.4 ; R5.1@36.75,12.25 36.75,10.4 ; U2.4 36.75,10.4
PA2/AN2/USART2_TX: C5.1 P1.23 R11.2 | length 14.8
  Top Layer w0.2: P1.23 32.319,10.019 33.769,10.019 35.25,11.5 35.25,15.275 37.425,17.45 37.425,17.5 38.5,17.5 39.55,18.55 R11.2
PA3/AN3/USART2_RX: P1.22
PA4/AN4/SPI1_NSS: P1.21
PA5/AN5/SPI1_SCK: P1.20
PA6/AN6/SPI1_MISO: P1.19
PA7/AN7/SPI1_MOSI: P1.18
PA8_LED2: P1.7 R8.1 | length 33.8
  Top Layer w0.2: R8.1 20.275,5.025 21.25,6 v1(21.25,15.25) ; P1.7 33.248,18 35,19.752 v1(35,22)
  Bottom Layer w0.2: v1(21.25,15.25) 22.5,15.25 26.75,19.5 32.5,19.5 v1(35,22)
PA9_LED1: P1.6 R10.1 | length 40.3
  Top Layer w0.2: R10.1@14.545,5.025 16.17,5.025 17.75,6.605 v1(17.75,15.25) ; P1.6 32.977,18.5 33.075,18.598 33.117,18.598 34.448,19.929 34.448,24.052 v1(33.75,24.75)
  Bottom Layer w0.2: v1(17.75,15.25) 27.25,24.75 v1(33.75,24.75)
PA10: P1.5
PA15/LED_RED: P1.39
PB0/AN8: P1.17
PB1/AN9: P1.16
PB2: P1.15
PB3/LED_GREEN: P1.38
PB4/LED_BLUE: P1.37
PB5/LED_BLUE: P1.36
PB6/USART1_TX: P1.34
PB7/USART1_RX: P1.33
PB8/I2C1_SCL: P1.32 P5.1 | length 29.8
  Top Layer w0.2: P5.1 18.54,19.458 25.979,12.019 28.681,12.019 P1.32
PB9/I2C1_SDA: P1.31 P5.2 | length 31.3
  Top Layer w0.2: P5.2 16,21.5 25.902,11.598 27.925,11.598 28.023,11.5 P1.31
PB10/USART3_TX/I2C2_SCL: P1.14 P4.2 R14.2 | length 47.6
  Top Layer w0.2: R14.2@16,42.5 R14.2 16,46.75 ; P4.2 16,46.75 ; P1.14 31.623,14.5 31.525,14.598 31.483,14.598 30.648,15.433 30.648,21.153 32.398,22.903 32.398,25.354 24.648,33.104 24.648,38.102 16,46.75
PB11/USART3_RX/I2C2_SDA: P1.13 P4.1 R13.2 | length 58.9
  Top Layer w0.2: R13.2 11.75,50.883 12.367,51.5 18,51.5 18.54,50.96 P4.1 18.54,44.708 25,38.248 25,33.25 32.75,25.5 32.75,22.757 31,21.007 31,15.581 31.483,15.098 31.525,15.098 31.623,15 P1.13
PB12/SPI2_NSS: P1.11 P3.4 | length 51.2
  Top Layer w0.2: P3.4 21.29,50.705 27,44.995 27,33.998 36.61,24.389 36.61,19.366 33.263,16.019 32.319,16.019 P1.11
PB13/SPI2_SCK: P1.10 P3.3 | length 51.4
  Top Layer w0.2: P3.3 18.75,52.747 26.648,44.849 26.648,33.852 36.257,24.243 36.257,19.512 33.264,16.519 32.319,16.519 P1.10
PB14/SPI2_MISO: P1.9 P3.2 | length 51.7
  Top Layer w0.2: P3.2 16.21,54.788 26.295,44.703 26.295,33.706 26.5,33.502 26.5,33.5 35.905,24.095 35.905,19.658 33.266,17.019 32.319,17.019 P1.9 P1.9@32.281,16.981
PB15/SPI2_MOSI: P1.8 P3.1 | length 52
  Top Layer w0.2: P3.1 13.75,58.42 13.75,56.75 25.943,44.557 25.943,33.557 35.552,23.948 35.552,19.804 33.267,17.519 32.319,17.519 P1.8
PC13: P1.30
VBAT: P1.47 P1.48 P1.49 P1.50 P2.1 R1.1 | length 30.4
  Top Layer w0.2: P2.1 13,28 14,27 v1(14,25.5) R1.1 ; v1(23.375,25.397) 24.303,25.397 P1.50 P1.49 P1.48 P1.47
  Bottom Layer w0.2: v1(14,25.5) 23.272,25.5 v1(23.375,25.397)
pads on no net: P1. P1.12 P1.35 P1.46 P2. R12.3 R12.4

## Polygon pours and split planes (outlines as drawn)
GND on Bottom Layer (solid, pour order 86): 0,60 60,60 60,0 0,0
GND on Top Layer (solid, pour order 84): 0,60 60,60 60,0 0,0

## Silkscreen, mask and mechanical layers (free items; w line width, h text height)
Top Overlay:
  lines w0.254: 25,0 60,0 60,30 25,30 25,0